# Altium PCB menu_PCB.PcbDoc
Units mm, origin at the board's own origin, x right, y up, seen from the top; angles counter-clockwise.
Board outline 15.62 x 45.47 mm, 2 copper layers (Top Layer, Bottom Layer); 4 components, 24 nets, 16 pads, 3 vias.
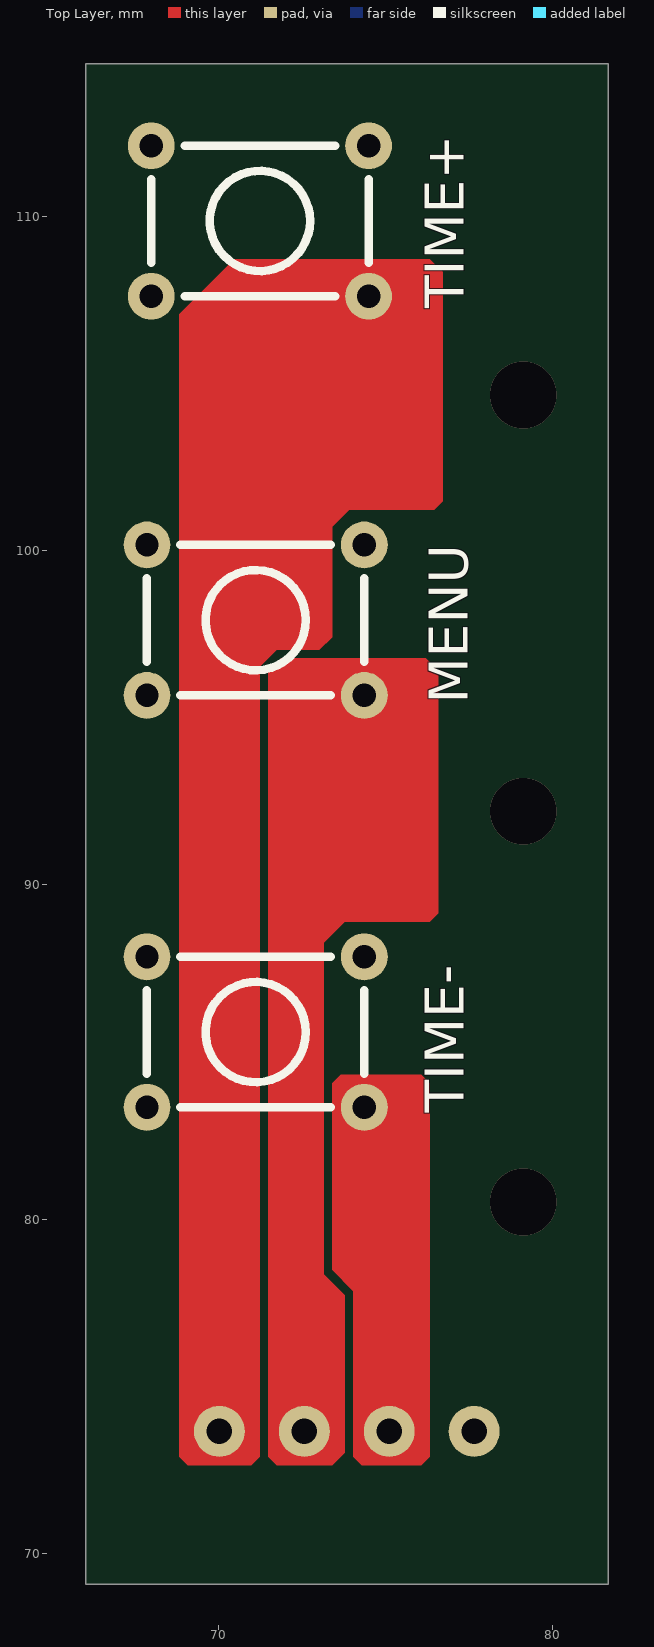
[diagram p0: Top Layer view]
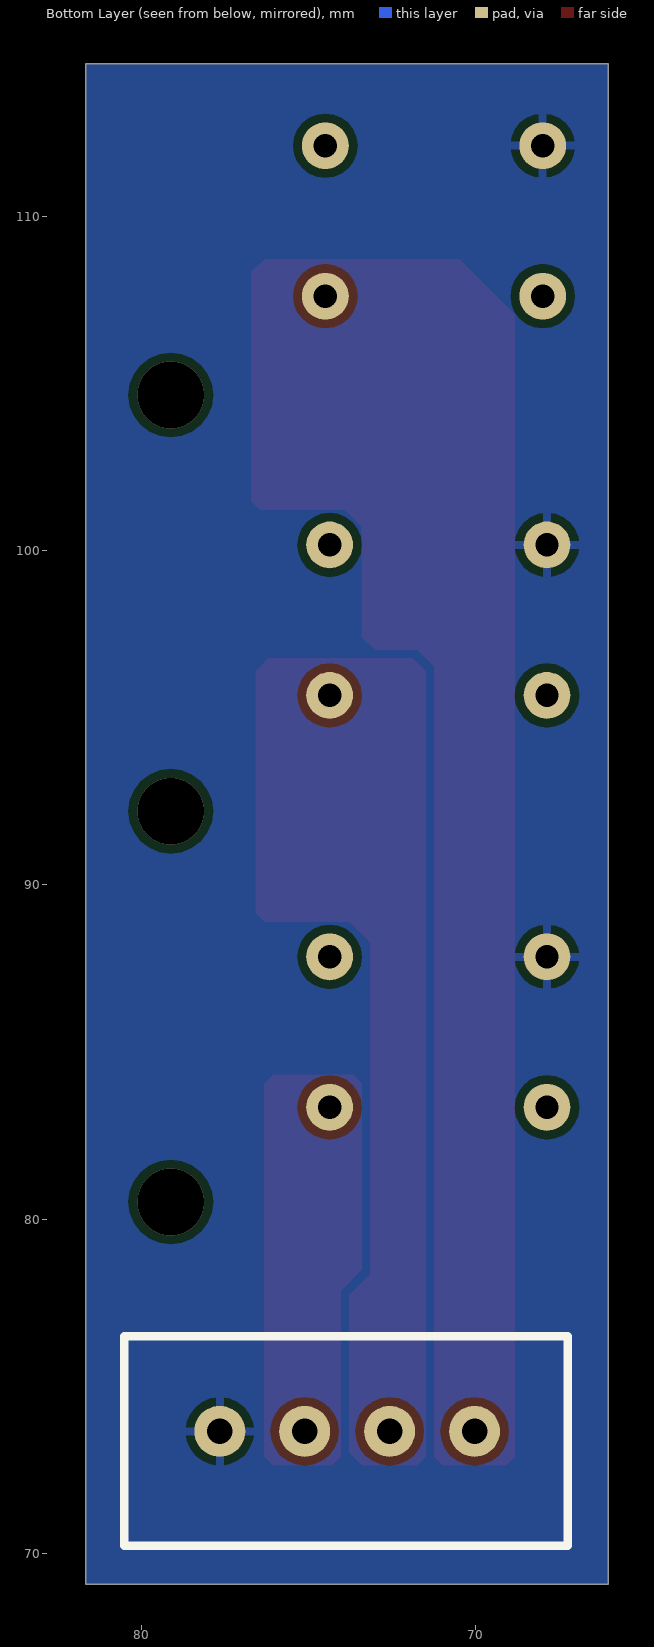
[diagram p1: Bottom Layer view, seen from below]
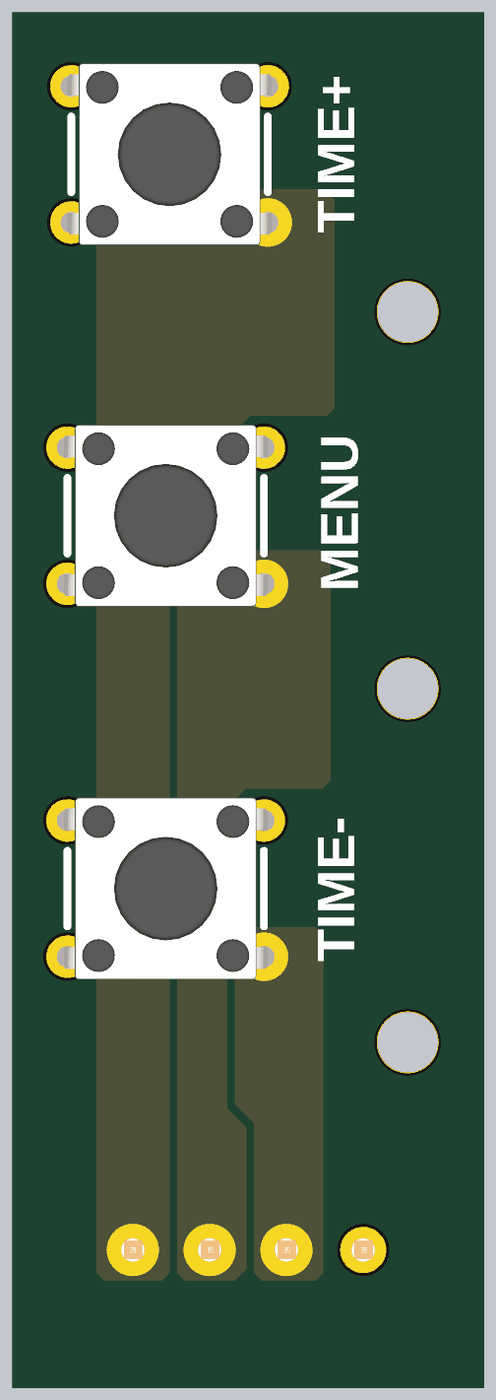
[diagram p2: 3D render of the assembled board from above, using the file's embedded part models]

## Layer stack, top to bottom
Top Solder: solder mask 0.0102, Solder Resist, Dk 3.5
Top Layer: signal copper 0.0356
Dielectric 1: dielectric 0.32, FR-4, Dk 4.8
Bottom Layer: signal copper 0.0356
Bottom Solder: solder mask 0.0102, Solder Resist, Dk 3.5

## Board outline
66.04,69.088 66.04,114.554 81.661,114.554 81.661,69.088

## Design rules (kind name [scope] priority, off if disabled: settings)
Clearance [All] p1: gap=0.254 ignorepadtopadclearanceinfootprint=FALSE except(0: Arc-Hole Track-Hole SMDPad-Hole THPad-Hole Via-Hole Fill-Hole Poly-Hole Region-Hole Text-Hole)
PolygonConnect [All] p1: connectstyle=Relief reliefconductorwidth=0.254 reliefentries=4 polygonreliefangle="90 Angle" airgapwidth=0.254
RoutingVias [All] p1: holewidth=0.711 width=1.27 viastyle="Through Hole" minholewidth=0.711 minwidth=1.27 maxholewidth=0.711 maxwidth=1.27
SolderMaskExpansion [All] p1: expansion=0.102 istentingtop=FALSE
Width [All] p1: maxlimit=0.254 minlimit=0.254 preferedwidth=0.254
30 further rules are at their usual default settings.

## Classes and differential pairs
component class menu_SCH: MENU TIME+ TIME-

## Components (designator, comment, footprint, x,y, rotation, side; value= is the part's Value field where it differs from the comment)
I2 "I2C_JACK" 4PIN_JST 77.654,73.66 r180 bottom
MENU "push_button" DIP_button 71.12,97.917 r0 top (schematic designator BT3)
TIME+ "push_button" DIP_button 71.247,109.855 r0 top (schematic designator BT4)
TIME- "push_button" DIP_button 71.12,85.598 r0 top (schematic designator BT2)

## Footprints (in the part's own frame and the unit in brackets; to place one, negate y for a bottom-side part, rotate by r counter-clockwise, add the part's x,y. Pads: shape width x height; smd on the part's side, far side on the other; paste and mask are expansions set on the pad)
4PIN_JST [mil]
  round 60 hole 30: 1(0,0) 2(100,0) 3(200,0) 4(300,0)
  silkscreen extent -112,-135 409,112, body extent -99,-124 398,100, height 276
DIP_button [mm]
  round 1.4 hole 0.7: 1(-3.25,2.25) 2(-3.25,-2.25) 3(3.25,2.25) 4(3.25,-2.25)
  silkscreen extent -3.25,-2.25 3.25,2.25, body extent -3.85,-3 3.85,3, height 4.95

## Part data
MENU TIME+ TIME-: "DIP tacttil push button"

## Via types
v1: diameter 2, hole 2, Top Layer to Bottom Layer, 3 vias

## Nets (pads, with @x,y where several pads share a name; then routed paths per layer and width w, separated by ;. In a path a pad name is that pad's centre, name@x,y a point inside that pad or via, vN(x,y) a via of type N, cw(c..) or ccw(c..) an arc to the next point about the centre after c; other vN are vias at no path point)
Net1_1: 
Net1_2: 
Net1_3: 
Net1_4: 
Net1_5: I2.1 MENU.1 TIME+.1 TIME-.1
Net2_1: 
Net2_4: 
NetBT1_4: 
NetBT2_4: I2.2 TIME-.4 | length 10.1
  Top Layer w0.254: TIME-.4 74.37,78.538 75.184,77.724 75.184,73.73 I2.2
NetBT3_4: I2.3 MENU.4 | length 23.3
  Top Layer w0.254: I2.3 72.574,94.799 73.406,95.631 74.334,95.631 MENU.4
NetBT4_4: I2.4 TIME+.4 | length 37
  Top Layer w0.254: I2.4 70.034,105.213 72.426,107.605 TIME+.4
NetC1_2: 
NetC3_2: 
NetC4_2: 
NetHALL_1_1: 
NetHALL_1_2: 
NetI1_2: 
NetI1_3: 
NetI1_4: 
NetLED1_2: 
NetLED2_2: 
NetR2_2: 
NetR3_2: 
NetR4_2: 
pads on no net: MENU.2 MENU.3 TIME+.2 TIME+.3 TIME-.2 TIME-.3
copper on no net:
  other v1: 79.121,80.518 79.121,92.202 79.121,104.648

## Polygon pours and split planes (outlines as drawn)
Net1_5 on Bottom Layer "NONET_L-01_P-001" (solid, pour order 0): 66.04,114.554 81.661,114.554 81.661,69.088 66.04,69.088

## Other copper
Top Layer:
  region net NetBT4_4: 71.247,72.898 71.247,96.52 71.755,97.028 73.025,97.028 73.406,97.409 73.406,100.711 73.914,101.219 76.454,101.219 76.708,101.473 76.708,108.331 76.327,108.712 70.485,108.712 68.834,107.061 68.834,72.898 69.088,72.644 70.993,72.644
  region net NetBT3_4: 73.787,73.025 73.787,77.724 73.152,78.359 73.152,88.265 73.787,88.9 76.327,88.9 76.581,89.154 76.581,96.393 76.2,96.774 71.882,96.774 71.501,96.393 71.501,72.898 71.755,72.644 73.406,72.644
  region net NetBT2_4: 74.041,72.898 74.041,77.851 73.406,78.486 73.406,84.074 73.66,84.328 76.073,84.328 76.327,84.074 76.327,72.898 76.073,72.644 74.295,72.644

## Silkscreen, mask and mechanical layers (free items; w line width, h text height)
Mechanical 1:
  the board outline again, w0.254